# Altium PCB HS1-HS2.PcbDoc
Units mil, origin at the board's own origin, x right, y up, seen from the top; angles counter-clockwise.
Board outline 3000 x 3550 mil, 4 copper layers (Top Layer, Internal Plane 1, Internal Plane 2, Bottom Layer), stack 30.634 mil thick; 67 components, 55 nets, 272 pads, 41 vias.
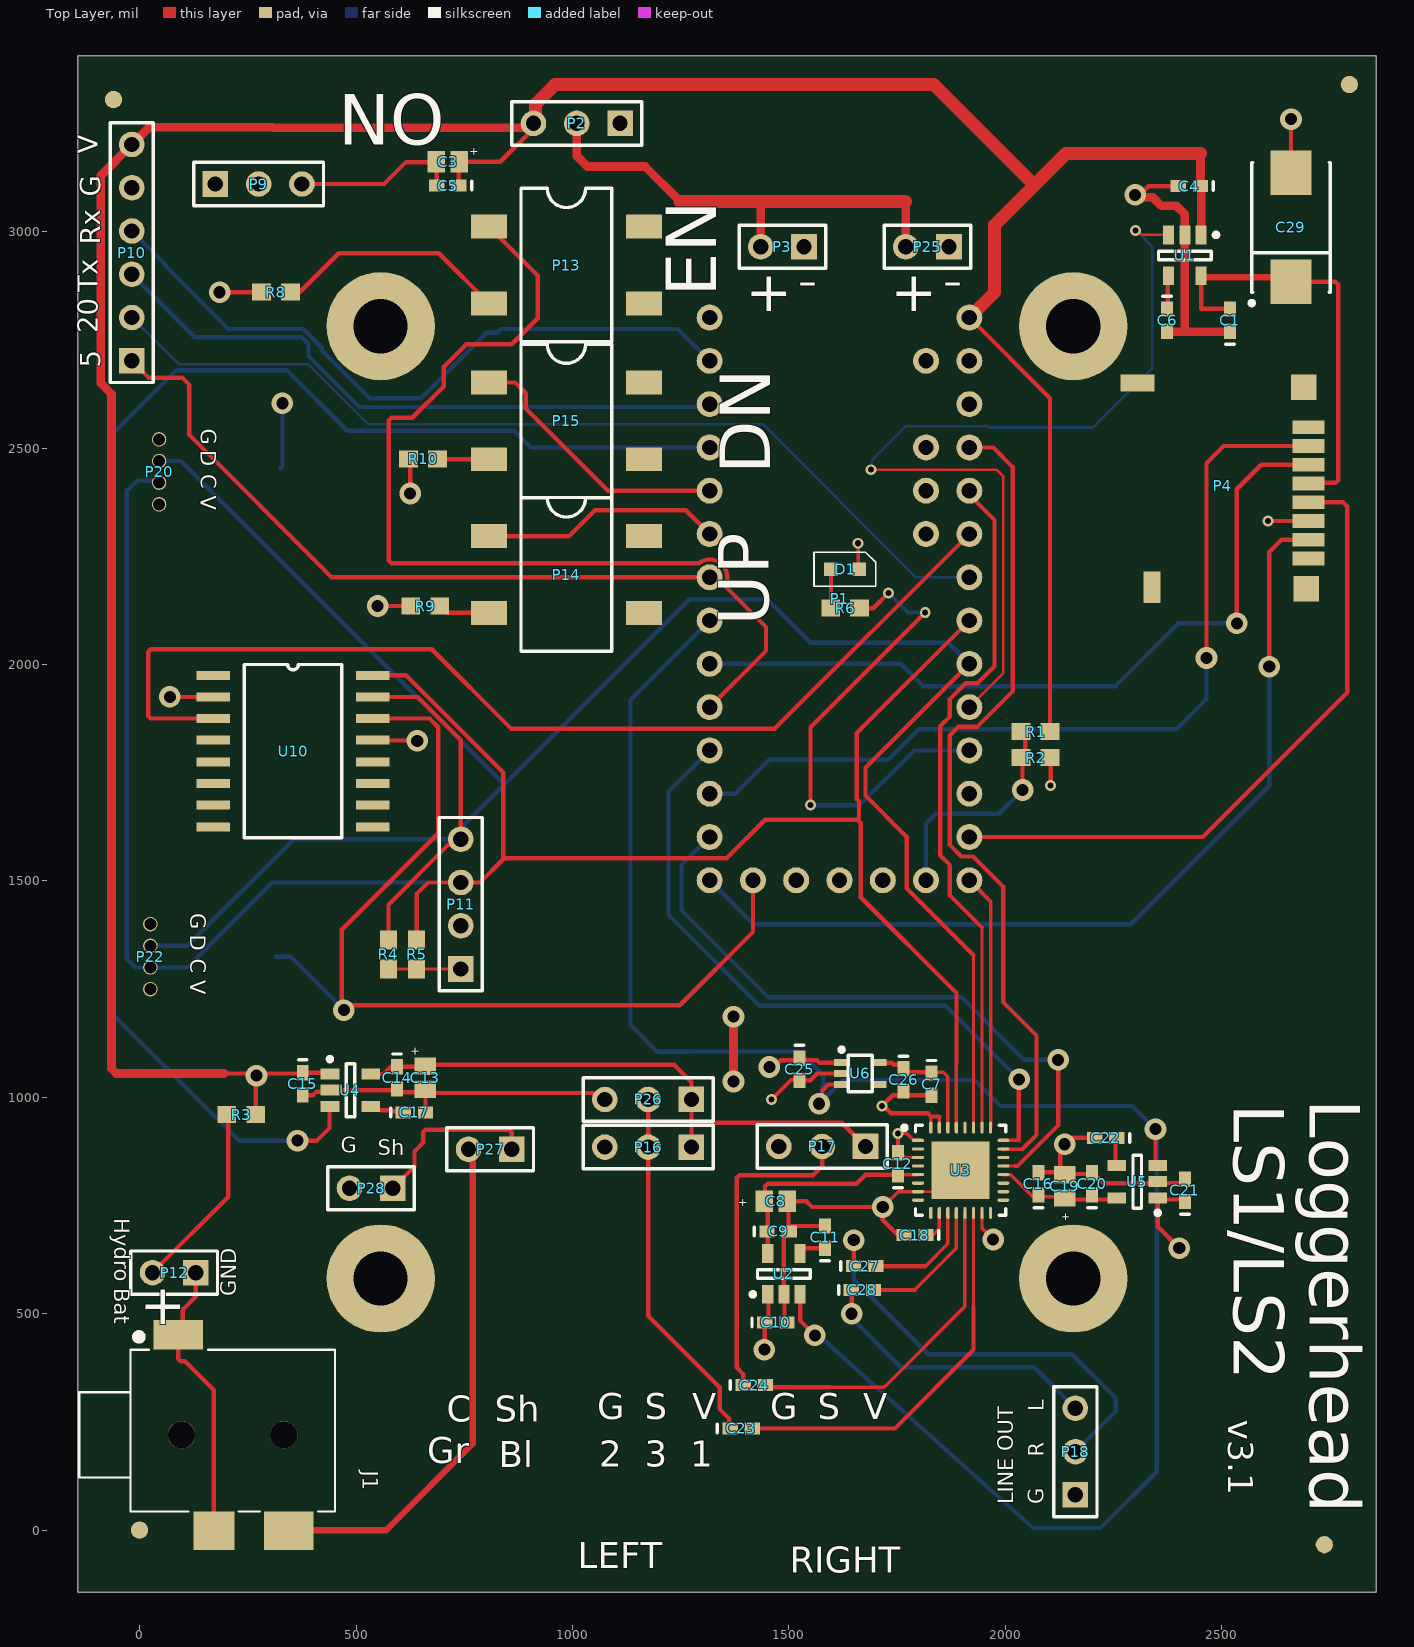
[diagram p0: Top Layer view]
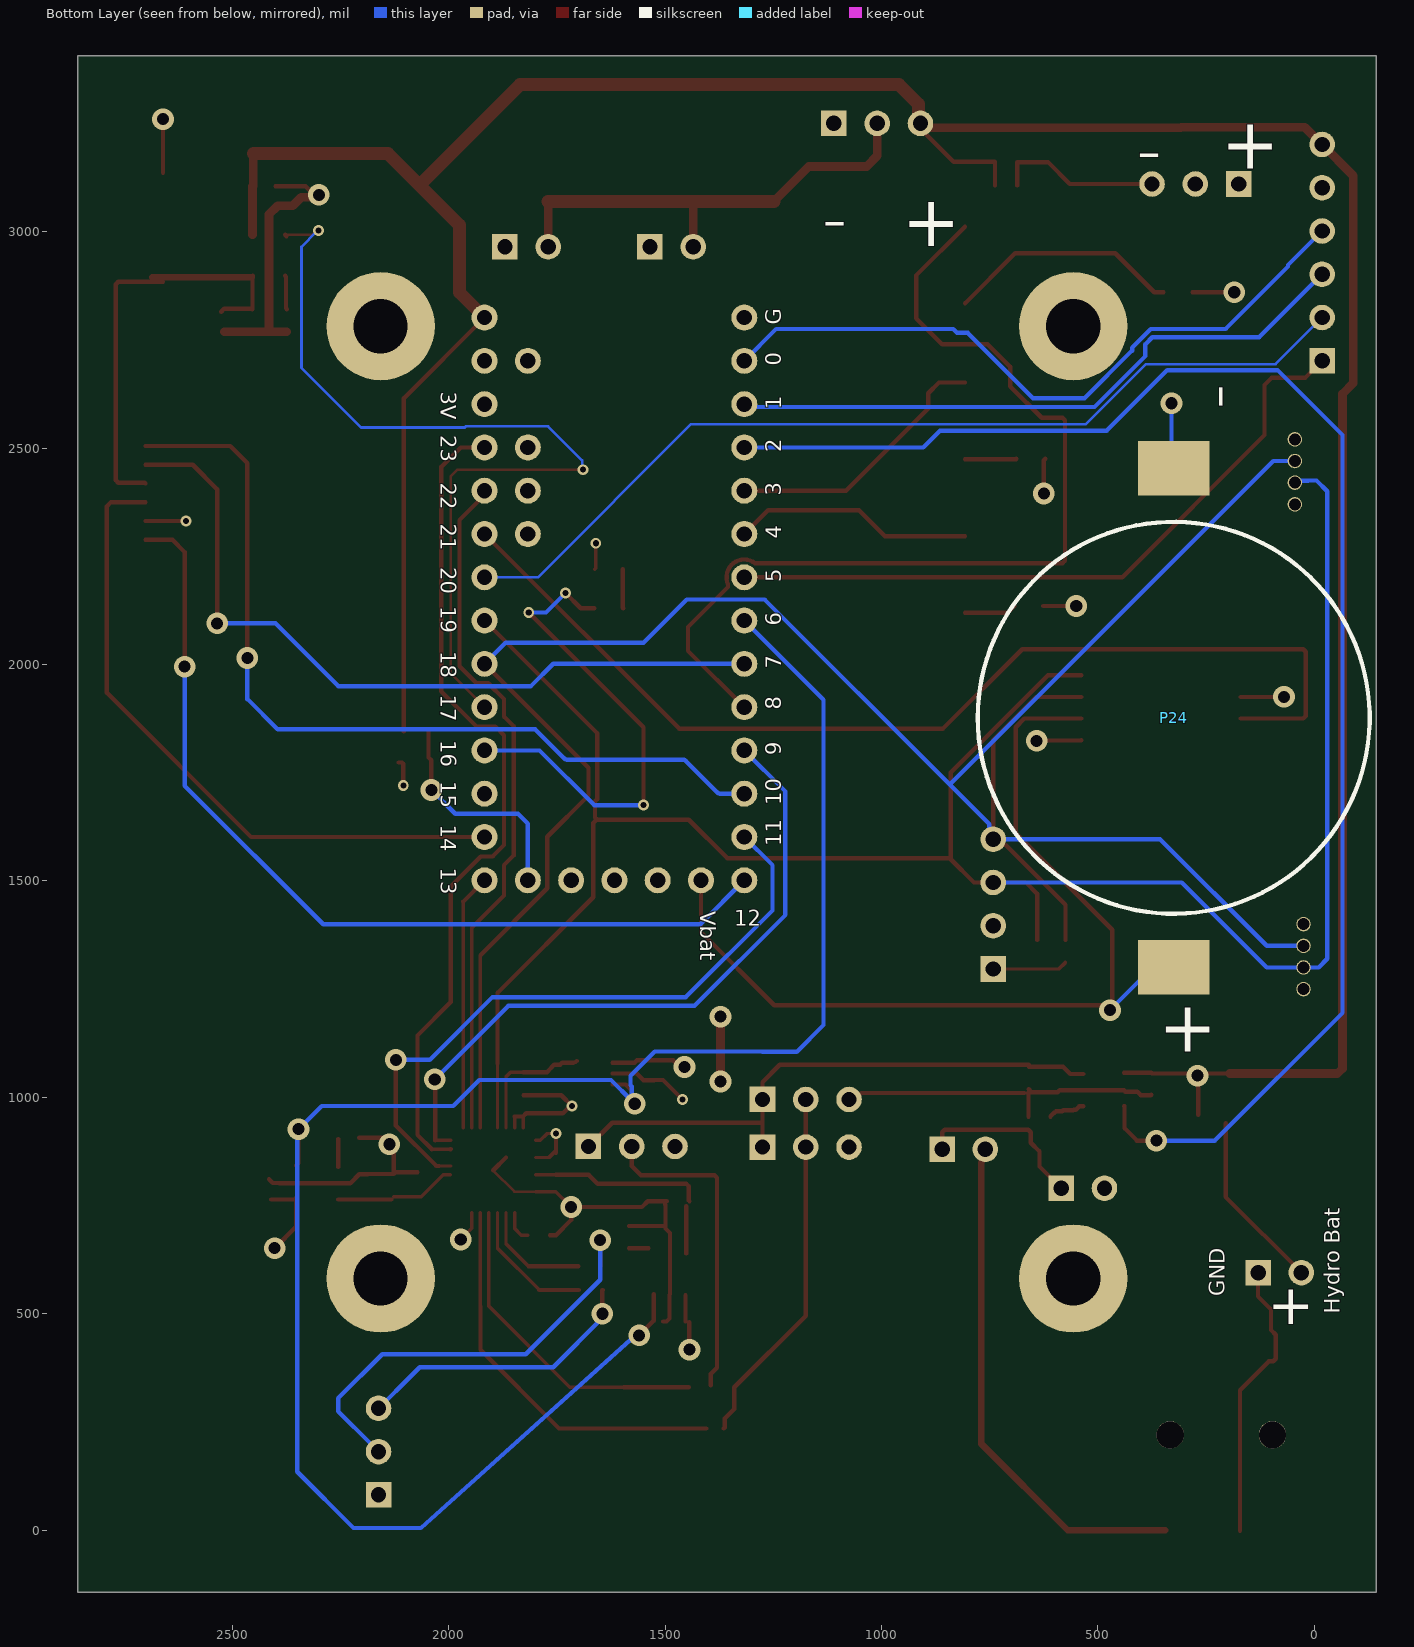
[diagram p1: Bottom Layer view, seen from below]
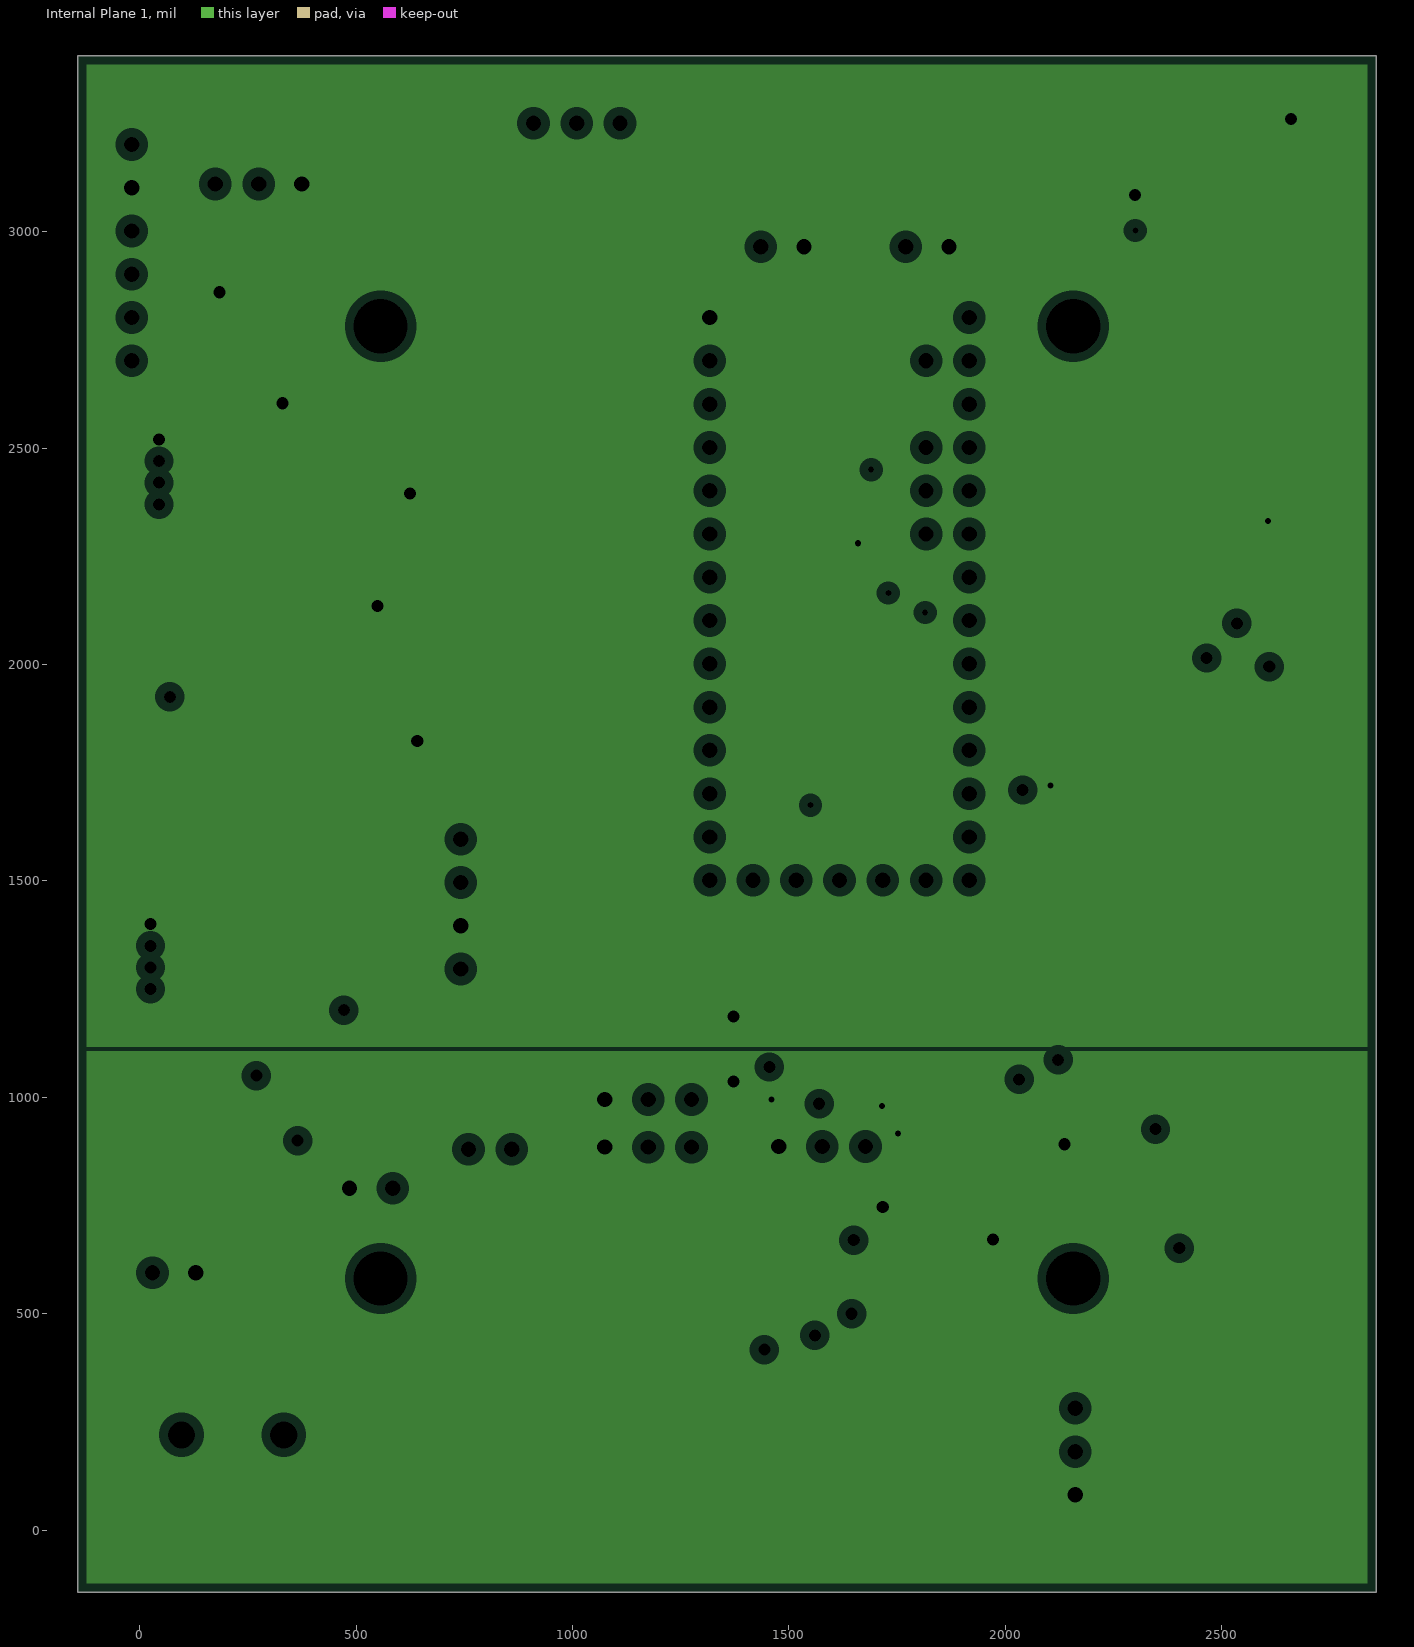
[diagram p2: Internal Plane 1, clearances drawn from the general rule]
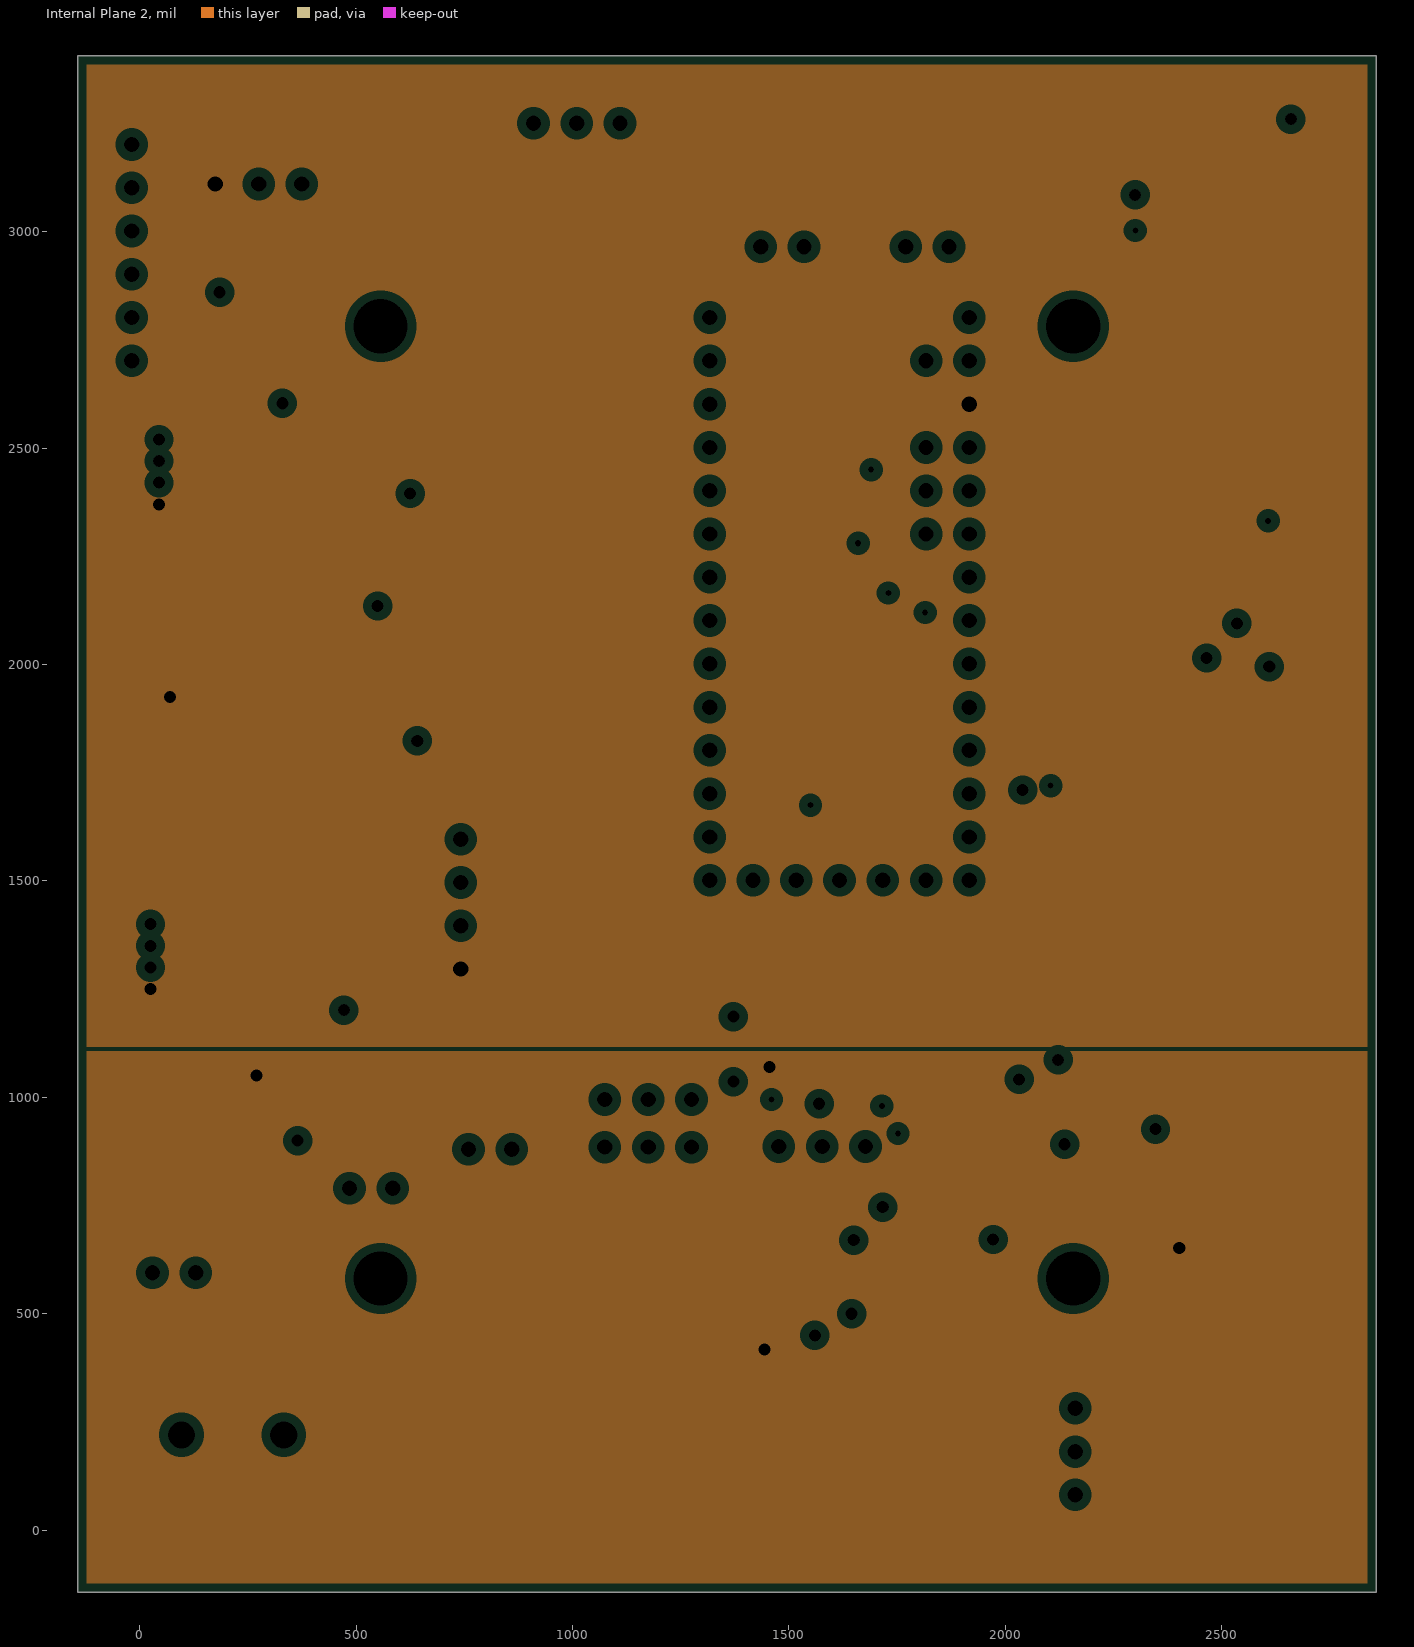
[diagram p3: Internal Plane 2, clearances drawn from the general rule]

## Layer stack, top to bottom
Top Solder: solder mask 0.4, Solder Resist, Dk 3.5
Top Layer: signal copper 1.4
Dielectric 1: core 10, FR-4, Dk 4.2
Internal Plane 1: plane copper 1.417, net (Multiple Nets)
Dielectric 3: prepreg 5, Dk 4.2
Internal Plane 2: plane copper 1.417, net (Multiple Nets)
Dielectric 2: core 10, Dk 4.2
Bottom Layer: signal copper 1.4
Bottom Solder: solder mask 0.4, Solder Resist, Dk 3.5

## Board outline
-142.95,-143.58 -142.95,3406.42 2857.05,3406.42 2857.05,-143.58

## Design rules (kind name [scope] priority, off if disabled: settings)
Clearance [All] p1: gap=6 ignorepadtopadclearanceinfootprint=FALSE except(0: Arc-Hole Track-Hole SMDPad-Hole THPad-Hole Via-Hole Fill-Hole Poly-Hole Region-Hole Text-Hole)
PlaneClearance [All] p1: clearance=20
PlaneConnect [All] p1: planeconnectstyle=Relief reliefexpansion=20 reliefentries=4 reliefconductorwidth=10 reliefairgap=10
PolygonConnect [All] p1: connectstyle=Relief reliefconductorwidth=10 reliefentries=4 polygonreliefangle="90 Angle" airgapwidth=10
RoutingVias [All] p1: holewidth=28 width=50 viastyle="Through Hole" minholewidth=28 minwidth=50 maxholewidth=28 maxwidth=50
SolderMaskExpansion [All] p1: expansion=4 istentingtop=FALSE
Width [All] p1: maxlimit=100 minlimit=6 preferedwidth=10
28 further rules are at their usual default settings.

## Classes and differential pairs
component class HS1-HS2: C1 C3 C4 C5 C6 C29 D1 P1 P2 P3 P4 P9 P10 P11 P13 P14 P15 P20 P22 P24 P25 R1 R2 R4 R5 R6 R8 R9 R10 U1 U10
component class HS1-HS2_audio: C7 C8 C9 C10 C11 C12 C13 C14 C15 C16 C17 C18 C19 C20 C21 C22 C23 C24 C25 C26 C27 C28 J1 P12 P16 P17 P18 P26 P27 P28 R3 U2 U3 U4 U5 U6

## Components (designator, comment, footprint, x,y, rotation, side; value= is the part's Value field where it differs from the comment)
C1 "2.2uF" 0402 2518.86,2795.16 r90 top value=0.1uF
C3 "10uF" Tant0805 712.05,3161.42 r0 top
C4 "2.2uF" 0402 2425.59,3105 r180 top value=0.1uF
C5 "0.1uF" 0402 712.05,3106.42 r180 top
C6 "0.01uF" 0402 2373.86,2795.16 r270 top value=0.1uF
C7 "0.1uF" 0402 1830,1030 r270 top
C8 "10uF" Tant0805 1470,760 r180 top
C9 "0.1uF" 0402 1475,690 r0 top
C10 "1uF" 0402 1470,480 r0 top value=0.1uF
C11 "0.01uF" 0402 1583.58,677.05 r90 top value=0.1uF
C12 "0.1uF" 0402 1752.05,846.42 r90 top
C13 "10uF" Tant0805 660,1045 r90 top
C14 "0.1uF" 0402 595,1045 r270 top
C15 "1uF" 0402 377.05,1031.42 r270 top value=0.1uF
C16 "0.1uF" 0402 2076.54,800.31 r90 top
C17 "0.01uF" 0402 635,965 r0 top value=0.1uF
C18 "0.1uF" 0402 1791.46,681.42 r180 top
C19 "10uF" Tant0805 2137.06,794.63 r270 top
C20 "0.1uF" 0402 2200.65,800.31 r90 top
C21 "1uF" 0402 2415,785 r90 top value=0.1uF
C22 "0.01uF" 0402 2232.05,906.42 r180 top value=0.1uF
C23 "1.0uF" 0402 1390,235 r0 top value=0.1uF
C24 "1.0uF" 0402 1420,335 r0 top value=0.1uF
C25 "1.0uF" 0402 1525,1065 r270 top value=0.1uF
C26 "1.0uF" 0402 1765,1040 r270 top value=0.1uF
C27 "1.0uF" 0402 1675,610 r0 top value=0.1uF
C28 "1.0uF" 0402 1670,555 r0 top value=0.1uF
C29 "T495X227K010ATE050" X 2660,3010 r90 top value=220uF
D1 "LED_0603" Diode0603 1630,2220 r0 top
J1 "MJ1-3510-SMT" CUI_MJ1-3510-SMT 215,220 r0 top
P1 "Teensy3.x" Teensy3.x 1817.05,2701.42 r180 top
P2 "switch" HDR1X3 1110,3250 r180 top
P3 "Header 2" HDR1X2 1535,2965 r180 top
P4 "microSD Hirose" "DM3D microSD" 2575,2485 r180 top
P9 "BIG CAP 1000 uF" HDR1X3 175,3110 r0 top
P10 "Header 6" HDR1X6 -17.95,2701.42 r90 top
P11 "Header 4" HDR1X4 742.05,1296.42 r90 top
P12 "Header 2" HDR1X2 130,595 r180 top
P13 "pushbutton" SOP4 807.05,3011.42 r0 top
P14 "pushbutton" SOP4 807.05,2296.42 r0 top
P15 "pushbutton" SOP4 807.05,2651.42 r0 top
P16 "HYDROPHONE" HDR1X3 1275,885 r180 top
P17 "HYDROPHONE" HDR1X3 1677.05,886.42 r180 top
P18 "Header 3" HDR1X3 2162,81.42 r90 top
P20 "1x4 1.27mm" "Header1x4 1.27mm" 45,2370 r90 top
P22 "1x4 1.27mm" "Header1x4 1.27mm" 25,1250 r90 top
P24 "CoinCellHolder" CoinCellHolder 325,1300 r90 bottom
P25 "Header 2" HDR1X2 1870,2965 r180 top
P26 "HYDROPHONE_MON" HDR1X3 1275,995 r180 top
P27 "Header 2" HDR1X2 860,880 r180 top
P28 "Header 2" HDR1X2 585,790 r180 top
R1 "100k" 3-0603 2070,1845 r0 top
R2 "100k" 3-0603 2070,1785 r180 top
R3 "empty" 3-0603 235,960 r0 top
R4 "4.7k" 3-0603 575,1330 r270 top
R5 "4.7k" 3-0603 640,1330 r270 top
R6 "330X" 3-0603 1630,2130 r180 top
R8 "10k" 3-0603 315,2860 r180 top
R9 "10k" 3-0603 660,2135 r180 top
R10 "10k" 3-0603 655,2475 r180 top
U1 "ADP1712AUJZ-3.3-R7" MF05A_N 2415,2945.16 r270 top
U2 "LP3985IM5-3.3" MF05A_N 1488.58,592.05 r90 top
U3 "SGTL5000" QFN32 1897.05,831.42 r0 top
U4 "LP3985IM5-3.3" MF05A_N 487.05,1016.42 r0 top
U5 "LP3985IM5-3.3" MF05A_N 2305,805 r180 top
U6 "TLV70018DCKR" TI-DCK5_V 1665,1055 r0 top
U10 "DS3231" DS3231 170,1975 r0 top

## Footprints (in the part's own frame and the unit in brackets; to place one, negate y for a bottom-side part, rotate by r counter-clockwise, add the part's x,y. Pads: shape width x height; smd on the part's side, far side on the other; paste and mask are expansions set on the pad)
3-0603 [mm] "Chip Resistor; Body 1.6 x 0.9 mm (LxW typ)"
  rect 1.1x1 smd: 1(-0.85,0) 2(0.85,0)
0402 [mm] "Chip Capacitor; Body 1.0 x 0.5 mm (LxW typ)"
  rect 0.9x0.7 smd: 1(-0.65,0) 2(0.65,0)
  silkscreen extent -1.4,-0.25 -1.4,0.25
CoinCellHolder [mm] "MPD BU2032SM-BT-GTR"
  rect 3.2x4.2 smd: 1(0,0) 2(29.3,0)
  silkscreen extent 3.15,-11.5 26.15,11.5
CUI_MJ1-3510-SMT [mm]
  rect 2.9x1.75 smd: 1(-3.2,5.875)
  rect 2.9x2.25 smd: 2(3.3,-5.625)
  rect 2.4x2.25 smd: 3(-1.1,-5.625)
  round 1.6 hole 1.6 unplated: ""(-3,0) ""(3,0)
  silkscreen extent -9,-4.5 6,5.95
Diode0603 [mm]
  rect 0.8x0.8 smd: A(-0.825,0) K(0.825,0)
  silkscreen extent -1.83,-1 1.8,1
"DM3D microSD" [mm] "MICROSD_HIROSE Push-Pull"
  rect 1.5x1.5 smd: 0(-3.048,7.874) 0(-2.921,-3.937)
  rect 1x1.85 smd: 0(6,7.8)
  rect 2x1 smd: 0(6.85,-4.191)
  rect 1.9x0.8 smd: 1(-3.188,-1.601) 2(-3.188,-0.501) 3(-3.188,0.599) 4(-3.188,1.699) 5(-3.188,2.799) 6(-3.188,3.899) 7(-3.188,4.999) 8(-3.188,6.099)
  body extent -3.65,-4.45 7.8,7.5, height 1.55
DS3231 [mm]
  rect 1.98x0.53 smd: 1(0,0) 2(0,-1.27) 3(0,-2.54) 4(0,-3.81) 5(0,-5.08) 6(0,-6.35) 7(0,-7.62) 8(0,-8.89) 9(9.37,-8.89) 10(9.37,-7.62) 11(9.37,-6.35) 12(9.37,-5.08) 13(9.37,-3.81) 14(9.37,-2.54) 15(9.37,-1.27) 16(9.37,0)
  silkscreen extent 1.83,-9.53 7.54,0.64
HDR1X2 [mm] "Connector; Header; 2 Position"
  rect 1.5x1.5 hole 0.9: 1(0,0)
  round 1.5 hole 0.9: 2(2.54,0)
  silkscreen extent -1.27,-1.27 3.81,1.27
HDR1X3 [mm] "Connector; Header; 3 Position"
  rect 1.5x1.5 hole 0.9: 1(0,0)
  round 1.5 hole 0.9: 2(2.54,0) 3(5.08,0)
  silkscreen extent -1.27,-1.27 6.35,1.27
HDR1X4 [mm] "Connector; Header; 4 Position"
  rect 1.5x1.5 hole 0.9: 1(0,0)
  round 1.5 hole 0.9: 2(2.54,0) 3(5.08,0) 4(7.62,0)
  silkscreen extent -1.27,-1.27 8.89,1.27
HDR1X6 [mm] "Connector; Header; 6 Position"
  rect 1.5x1.5 hole 0.9: 1(0,0)
  round 1.5 hole 0.9: 2(2.54,0) 3(5.08,0) 4(7.62,0) 5(10.16,0) 6(12.7,0)
  silkscreen extent -1.27,-1.27 13.97,1.27
"Header1x4 1.27mm" [mm]
  round 0.85 hole 0.7: 1(0,0) 2(1.27,0) 3(2.54,0) 4(3.81,0)
MF05A_N [mm] "SOT23, 5-Leads, Body 2.9x1.6mm, Pitch 0.95mm, Lead Span 2.8mm, IPC Medium Density"
  rect 1.1x0.65 smd: 1(-1.2,0.95) 2(-1.2,0) 3(-1.2,-0.95) 4(1.2,-0.95) 5(1.2,0.95)
  silkscreen extent -1.32,-1.55 0.25,1.95, body extent -0.9,-1.55 0.9,1.55, height 1.19
QFN32 [mm]
  oval 0.7x0.2 smd: 1(-2.5,1.75) 2(-2.5,1.25) 3(-2.5,0.75) 4(-2.5,0.25) 5(-2.5,-0.25) 6(-2.5,-0.75) 7(-2.5,-1.25) 8(-2.5,-1.75) 17(2.5,-1.75) 18(2.5,-1.25) 19(2.5,-0.75) 20(2.5,-0.25) 21(2.5,0.25) 22(2.5,0.75) 23(2.5,1.25) 24(2.5,1.75)
  oval 0.2x0.7 smd: 9(-1.75,-2.5) 10(-1.25,-2.5) 11(-0.75,-2.5) 12(-0.25,-2.5) 13(0.25,-2.5) 14(0.75,-2.5) 15(1.25,-2.5) 16(1.75,-2.5) 25(1.75,2.5) 26(1.25,2.5) 27(0.75,2.5) 28(0.25,2.5) 29(-0.25,2.5) 30(-0.75,2.5) 31(-1.25,2.5) 32(-1.75,2.5)
  rect 3.4x3.4 smd paste-1.2: 33(0,0)
  silkscreen extent -3.42,-2.65 2.65,2.65, body extent -2.5,-2.5 2.5,2.5, height 1
SOP4 [mm]
  rect 2.1x1.4 smd: 1(0,0) 2(0,-4.5) 3(9.1,-4.5) 4(9.1,0)
  silkscreen extent 1.89,-6.75 7.21,2.25
Tant0805 [mil]
  rect 40x50 smd: 1(-26.5,0) 2(26.5,0)
Teensy3.x [mil]
  round 60 hole 35.43: 0(500,0) 1(500,100) 2(500,200) 3(500,300) 3.3V(-100,100) 3.3V2(300,1200) 4(500,400) 5(500,500) 6(500,600) 7(500,700) 8(500,800) 9(500,900) 10(500,1000) 11(500,1100) 12(500,1200) 13(-100,1200) 14(-100,1100) 15(-100,1000) 16(-100,900) 17(-100,800) 18(-100,700) 19(-100,600) 20(-100,500) 21(-100,400) 22(-100,300) 23(-100,200) A10(0,300) A11(0,400) A14(0,1200) AGND(-100,0) AREF(0,200) GND(500,-100) GND2(200,1200) PGM(100,1200) VBat(400,1200) Vin(-100,-100) VUSB(0,0)
TI-DCK5_V [mm] "SOT23, 5-Leads, Body 2x1.25mm, Pitch 0.65mm"
  rect 0.9x0.4 smd: 1(-1.1,0.65) 2(-1.1,0) 3(-1.1,-0.65) 4(1.1,-0.65) 5(1.1,0.65)
  silkscreen extent -1.22,-1.07 0.7,1.52, body extent -0.63,-1 0.63,1, height 1.1
X [mm] "Capacitor, SM Tantalum; Body 7.3 x 4.3 mm (LxW typ)"
  rect 2.6x2.4 smd: 1(-3.2,0) 2(3.2,0)
  silkscreen extent -4.57,-2.3 3.8,2.42

## Part data
C1 C4 C5 C6 C7 C9 C10 C11 C12 C14 C15 C16 C17 C18 C20 C21 C22 C23 C24 C25 C26 C27 C28: library part C0402, "Ceramic Chip Capacitor - Standard", PackageDocument=Mar-2001, Code_IPC="1005 [0402]", Code_JEITA=0402, ComponentLink1Description="Manufacturer Link", ComponentLink1URL=http://www.kemet.com/, ComponentLink2Description=Datasheet, ComponentLink2URL=http://www.kemet.com/kemet/web/homepage/kechome.nsf/vapubfilesname/F3102TA.pdf/$file/F3102TA.pdf, DatasheetDocument=Mar-2001, LatestRevisionDate=19-Mar-2004, LatestRevisionNote="Silkscreen size reduced.", Note="Footprint corresponds to dimensions for bulk cassette packaging. This case size has tightened tolerances.", PackageReference=0402, Published=17-Jul-2002, Publisher="Altium Limited"
C3 C8 C13 C19: library part Tant0805
C29: library part T495X, "Solid Tantalum Chip Capacitor, Standard T495 Series - Low ESR, Surge Robust", PackageDocument=Mar-2001, Code_JEITA=7343-43, ComponentLink1Description="Manufacturer Link", ComponentLink1URL=http://www.kemet.com/, ComponentLink2Description=Datasheet, ComponentLink2URL=http://www.kemet.com/kemet/web/homepage/kechome.nsf/vapubfilesname/F3102TA.pdf/$file/F3102TA.pdf, DatasheetDocument=Mar-2001, LatestRevisionDate=19-Mar-2004, LatestRevisionNote="Silkscreen dimensions re-sized.", PackageReference=X, PCB_Layout="Round Glue Pad at 2.9 ±0.1mm in diameter at KEMET's option", Published=17-Jul-2002, Publisher="Altium Limited"
J1: "3.5 mm, Mono, Right Angle, Surface Mount (SMT), Audio Jack Connector", Package=None, Availability=Unavailable, MF="{'manufacturer': u'CUI'}", MP=MJ1-3510-SMT, Price=None
P2 P9 P16 P17 P26: library part "Header 3", "Header, 3-Pin", LatestRevisionDate=17-Jul-2002, LatestRevisionNote="Re-released for DXP Platform.", Publisher="Altium Limited"
P3 P12 P25 P27 P28: "Header, 2-Pin", LatestRevisionDate=17-Jul-2002, LatestRevisionNote="Re-released for DXP Platform.", Publisher="Altium Limited"
P4: Supplier Part Number 1=HR1941DKR-ND, Supplier 1=Digi-Key
P10: "Header, 6-Pin", LatestRevisionDate=17-Jul-2002, LatestRevisionNote="Re-released for DXP Platform.", Publisher="Altium Limited"
P11: "Header, 4-Pin", LatestRevisionDate=17-Jul-2002, LatestRevisionNote="Re-released for DXP Platform.", Publisher="Altium Limited"
P13 P14 P15: Supplier Part Number 1=450-1757-2-ND, Supplier 1=Digi-Key
P18: "Header, 3-Pin", LatestRevisionDate=17-Jul-2002, LatestRevisionNote="Re-released for DXP Platform.", Publisher="Altium Limited"
P20 P22: library part "Header 1x4 1.27mm"
P24: Supplier Part Number 1=BU2032SM-BT-GCT-ND, Supplier 1=Digi-Key
R1 R2 R3 R4 R5 R6 R8 R9 R10: library part ERJ3RK, "Precision Thick Film Chip Resistor, 10 Ohm to 1M Ohm Range, 1% and 0.5% Tolerance, 0603 Size, 0.063 W", PackageDocument=Mar-2003, Code_IPC="1608 [0603]", ComponentLink1Description="Manufacturer Link", ComponentLink1URL=http://www.panasonic.com/industrial/components/resistive_products.htm, ComponentLink2Description=Datasheet, ComponentLink2URL=http://www.panasonic.com/industrial/components/pdf/AOA0000CE2.pdf, LatestRevisionDate=19-Mar-2004, LatestRevisionNote="Silkscreen size reduced.", PackageReference=3-0603, Published=17-Dec-2003, Publisher="Altium Limited"
U1: library part LP3985IM5-3.3, "Micropower, 150mA Low-Noise Ultra Low-Dropout CMOS Voltage Regulator", DigiKeyPartNumber=LP3985IM5-3.3CT-ND, Manufacturer="National Semiconductor", PackageTopMarking=LDQB*XTT, PowerWise=N, ComponentLink1Description="LP3985 Datasheet", ComponentLink1URL=http://www.national.com/ds/LP/LP3985.pdf, ComponentLink2Description="LP3985 Web Page", ComponentLink2URL=http://www.national.com/pf/LP/LP3985.html, ComponentLink3Description="MF05A Package Page", ComponentLink3URL=http://www.national.com/packaging/folders/mf05a.html, CompType="LDO IC", DatasheetVersion=Aug-2005, PackageDescription="Molded SOT-23, .115 x .063 x .040 in Body, 5 Lead, .0375 in Pitch", PackageReference=MF05A, PackageVersion="revD, Aug-2008", PartNumber=LP3985IM5-3.3, PinCount=5, Published=4-Dec-2008, Publisher="Altium Limited", RoHS=O
U2 U4 U5: "Micropower, 150mA Low-Noise Ultra Low-Dropout CMOS Voltage Regulator", DigiKeyPartNumber=LP3985IM5-3.3CT-ND, Manufacturer="National Semiconductor", PackageTopMarking=LDQB*XTT, PowerWise=N, ComponentLink1Description="LP3985 Datasheet", ComponentLink1URL=http://www.national.com/ds/LP/LP3985.pdf, ComponentLink2Description="LP3985 Web Page", ComponentLink2URL=http://www.national.com/pf/LP/LP3985.html, ComponentLink3Description="MF05A Package Page", ComponentLink3URL=http://www.national.com/packaging/folders/mf05a.html, CompType="LDO IC", DatasheetVersion=Aug-2005, PackageDescription="Molded SOT-23, .115 x .063 x .040 in Body, 5 Lead, .0375 in Pitch", PackageReference=MF05A, PackageVersion="revD, Aug-2008", PartNumber=LP3985IM5-3.3, PinCount=5, Published=4-Dec-2008, Publisher="Altium Limited", RoHS=O
U6: "Single Output LDO, 200 mA, Fixed 1.8 V Output, 2 to 5.5 V Input, with Low IQ, 5-pin SC70 (DCK), -40 to 125 degC, Green (RoHS & no Sb/Br)", Manufacturer="Texas Instruments", Supplier Part Number 1=296-32409-2-ND, Accuracy(%)=2, Code_JEDEC=MO-203, ComponentLink1Description="Manufacturer URL", ComponentLink1URL=http://www.ti.com/, ComponentLink2Description=Datasheet, ComponentLink2URL=http://www.ti.com/general/docs/lit/getliterature.tsp?genericPartNumber=TLV70018&fileType=pdf, ComponentLink3Description="Package Specification", ComponentLink3URL=http://www.ti.com/litv/pdf/mpds025f, DatasheetVersion=SLVSA00D, Eco-Plan="Green (RoHS & no Sb/Br)", Fixed Output Options(V)=1.8, Iout(Max)(A)=0.2, Iq(Typ)(mA)=0.03, Mounting Technology="Surface Mount", PackageDescription="5-Pin Plastic Small-Outline, Body 2 x 1.25 mm, Pitch 0.65 mm", PackageReference=DCK5, PackageVersion=4093553-3/G, PartNumber=TLV70018DCKR, SubFamily="Single Channel LDO", Supplier 1=Digi-Key, Supplier 2=Digi-Key, Supplier 3=Digi-Key, Supplier 4=Newark, Supplier 5=Mouser, Supplier Part Number 2=296-32409-1-ND, Supplier Part Number 3=296-32409-6-ND, Supplier Part Number 4=55R7461, Supplier Part Number 5=595-TLV70018DCKR, Vdo(Typ)(mV)=175, Vin(Max)(V)=5.5, Vin(Min)(V)=2, Vout Adj(Max)(V)=1.8, Vout Adj(Min)(V)=1.8
U10: Supplier Part Number 1=DS3231S#-ND, Supplier 1=Digi-Key

## Free pads (board coordinates)
  round 40 smd paste-20 mask+5: 0(-60,3305) 0(0,0) 0(2737.05,-33.58) 0(2795,3340)
  round 250 hole 125: 0(557.05,581.42) 0(557.05,2781.42) 0(2157.05,581.42) 0(2157.05,2781.42)

## Via types
v1: diameter 50, hole 28, Top Layer to Bottom Layer, tented both sides, 30 vias
v2: diameter 25, hole 14, Top Layer to Bottom Layer, tented both sides, 9 vias
v3: diameter 25, hole 14, Top Layer to Bottom Layer, 2 vias

## Nets (pads, with @x,y where several pads share a name; then routed paths per layer and width w, separated by ;. In a path a pad name is that pad's centre, name@x,y a point inside that pad or via, vN(x,y) a via of type N, cw(c..) or ccw(c..) an arc to the next point about the centre after c; other vN are vias at no path point)
AGND: C7.2 C8.1 C9.2 C10.2 C11.2 C12.2 C13.1 C14.2 C15.2 C16.2 C17.2 C18.2 C19.1 C20.2 C21.2 C22.2 C25.2 C26.2 J1.1 J1.3 P12.1 P16.3 P17.3 P18.1 P26.3 P28.2 U2.2 U3.1 U3.3 U3.7 U3.15 U3.31 U3.32 U3.33 U4.2 U5.2 U6.2 | length 3586.8
  Top Layer w6: U3.7 1847.83,782.2 U3.33
  Top Layer w8: v1@1723.27,752.64 1752.83,782.2 U3.7 ; C12.2@1752.05,877.01 1768.11,860.94 U3.3 ; v3(1752.05,916.42) 1772.05,916.42 1788.15,900.31 U3.1 ; U3.32 1828.15,955.31 ; U3.31 1847.83,955.63 ; U3.15 1946.26,697.2 v1(1972.05,671.42)
  Top Layer w10: P12.1@152.32,572.68 P12.1 130,540 100,510 100,462.28 J1.1 89.02,395.86 94.87,390 105,390 171.69,323.31 J1.3 ; C15.2 377.87,1005 400.86,1005 409.01,1013.15 436.53,1013.15 U4.2 588.27,1016.42 592.64,1012.05 653.55,1012.05 C13.1 ; C17.2@660.59,955 C17.2 660.59,1008.46 C13.1@662.05,1009.92 ; C13.1@670,1009.92 1046.81,1009.92 P26.3@1075,981.73 ; v2(1460,995) 1505,1040 C25.2@1525,1040 ; C8.1 C8.1@1500.08,760 ; C8.1@1499.17,751.14 1499.17,697.05 1488.58,686.46 U2.2 1490,543.39 1490,488.78 1496.73,482.05 C10.2@1504.17,482.05 ; C8.1@1500.08,752.05 C8.1@1500.08,760 ; C9.2@1504.76,702.64 C11.2 ; C25.2 1550,1039.41 1565.59,1055 U6.2 ; v1@1723.27,752.64 v1(1717.05,746.42) ; C12.2 1752.05,877.01 v3(1752.05,916.42) ; C18.2 1752.05,681.42 1717.05,716.42 v1(1717.05,746.42) ; C7.2@1827.05,1004.92 1739.92,1004.92 v3(1715,980) 1719.06,980 1736.07,962.99 1820.79,962.99 1828.15,955.63 1847.83,955.63 ; U3.33@1867.52,860.94 U3.33 ; C16.2@2072.05,827.01 C19.1@2122.64,827.01 ; v1@2127.05,881.42 2127.05,822.92 2186.14,822.92 ; v1@2152.05,906.42 C22.2 ; C20.2@2187.05,822.01 2206.46,822.01 2227.05,801.42 2391.42,801.42 2392.08,802.08 2406.49,802.08 C21.2 ; C8.1@1500.08,760 1540,760 1553.58,746.42 v1(1717.05,746.42)
  other v1: 2137.05,891.42 1372.05,1036.42
BATT_BACK: P1.VBat P24.1 U10.14 | length 2241.5
  Top Layer w10: U10.14 670,1875 690,1855 690,1610 467.05,1387.05 467.05,1212.87 1247.87,1212.87 1417.05,1382.05 P1.VBat
  Bottom Layer w10: P24.1@315,1325 348.46,1325 v1(472.05,1201.42)
BCLK: P1.9 U3.24 | length 1563.8
  Top Layer w8: U3.24 2030.94,900.31
  Top Layer w10: 2030.94,900.31 2030.94,1040.31 v1(2032.05,1041.42)
  Bottom Layer w10: P1.9 1222.05,1706.42 1222.05,1421.42 1432.05,1211.42 1862.05,1211.42 v1(2032.05,1041.42)
CAL_PORT: J1.2 P27.2 | length 1192.4
  Top Layer w15: J1.2@344.92,0 555,0 570,0 770,200 770,849.19 768.43,850.76 768.43,881.62 P27.2@770,883.19
CS: P1.10 P4.2 | length 2034.2
  Top Layer w10: v1@2465,2020 2465,2465 2504.72,2504.72 P4.2
  Bottom Layer w10: P1.10 1372.28,1701.42 ccw(c1372.28,1711.42) 1379.33,1704.33 1452.09,1777.09 cw(c1459.14,1770) 1459.14,1780 1725.86,1780 ccw(c1725.86,1790) 1732.93,1782.93 1800,1850 2395,1850 2465,1920 v1@2465,2020
  other v1: 2465,2015
DGND: C1.1 C3.1 C4.2 C5.2 C6.2 C29.2 D1.K P1.GND P3.1 P4.6 P9.3 P10.5 P11.2 P20.4 P22.4 P24.2 P25.1 R2.1 R8.2 R9.2 R10.2 U1.2 U10.13 | length 1895.1
  Top Layer w8: v2(1660,2280) 1660,2222.48 D1.K
  Top Layer w10: v1(185,2860) R8.2 ; P9.3 565,3110 615.51,3160.51 686.46,3160.51 C5.2 ; U10.13 539.69,1824.21 640.79,1824.21 v1(641.58,1823.42) ; v1(550,2135) R9.2 ; R10.2 625,2471.54 v1(625,2395) ; v2(2104.8,1720.2) 2104.8,1770.31 2107.95,1773.46 R2.1@2115,1773.46 ; v1(2300,3085) 2310.82,3085 2330.82,3105 C4.2 ; C6.2 C6.2@2374.77,2768.66 ; v2(2607.16,2331.6) 2700.41,2331.6 P4.6 ; C29.2 v1(2660,3260)
  Top Layer w20: v1(2300,3085) 2305.74,3079.26 2340.74,3079.26 2360,3060 2395,3060 2415,3040 U1.2 2415,2768.66 ; C6.2@2374.77,2768.66 2415,2768.66 ; C1.1@2518.86,2768.66 2415,2768.66
  Bottom Layer w10: P24.2 330,2458.54 v1(330,2603.54)
  other v1: 1372.05,1186.42
DN-TX: P1.3 P15.1 | length 634.1
  Top Layer w10: P15.1 867.05,2651.42 892.05,2626.42 892.05,2591.42 1082.05,2401.42 P1.3
ENT-RST: P1.8 P13.1 | length 2252.8
  Top Layer w10: P13.1 920,2898.46 920,2800 860,2740 755,2740 702.5,2687.5 702.5,2642.5 630,2570 581.86,2570 576,2564.14 576,2239.9 581.86,2234.05 1292.22,2234.05 cw(c1317.05,2201.42) 1354.61,2184.97 1354.61,2183 1354.61,2178.86 1447.05,2086.42 1447.05,2031.42 P1.8
HYDRO_EN: P1.2 U4.3 | length 3543.7
  Top Layer w10: v1(365,900) 410,900 438.82,928.82 438.82,980 U4.3
  Bottom Layer w10: v1(365,900) 230,900 -65,1195 -65,2530 85,2680 340,2680 480,2540 865,2540 903.58,2501.42 P1.2
I2SDIN: P1.22 U3.26 | length 1603.2
  Top Layer w8: U3.26 1946.26,1392.2
  Top Layer w10: P1.22 1917.05,2391.42 1975,2333.46 1975,1995.73 1935.69,1956.42 1908.41,1956.42 1872.05,1920.06 1872.05,1879.54 1850,1857.5 1850,1558.46 1872.05,1536.42 1872.05,1466.42 1946.26,1392.2
I2SDOUT: P1.13 U3.25 | length 591.8
  Top Layer w8: U3.25 1965.94,1452.52
  Top Layer w10: P1.13 1965.94,1452.52
IN_L: C23.2 U3.14 | length 913.5
  Top Layer w8: 1926.57,516.78 U3.14
  Top Layer w10: C23.2@1404.75,235 1745,235 1926.57,416.57 1926.57,516.78
IN_R: C24.2 U3.13 | length 754.8
  Top Layer w8: 1595.63,330 1720,330 1906.89,516.89 U3.13
  Top Layer w10: C24.2@1445.59,330 1595.63,330
INT: P1.21 U10.3 | length 2462.3
  Top Layer w10: U10.3 25.86,1875 20,1880.86 20,2029.14 25.86,2035 675,2035 858.18,1851.82 1467.45,1851.82 P1.21
LED1: P1.16 R6.1 | length 1158.9
  Top Layer w10: v2(1550,1675) 1550,1855 v2(1815,2120) ; R6.1 1695,2130 v2(1730,2165)
  Bottom Layer w10: v2(1550,1675) 1663.55,1675 1789.97,1801.42 P1.16 ; v2(1730,2165) 1775,2120 v2(1815,2120)
LRCLK: P1.23 U3.23 | length 1936.7
  Top Layer w8: U3.23@1995.79,880.31 2039.23,880.31
  Top Layer w10: P1.23 1972.05,2501.42 2017.05,2456.42 2017.05,1937.78 1935.69,1856.42 1892.05,1856.42 1872.05,1836.42 1872.05,1582.78 1898.41,1556.42 1925.69,1556.42 1995,1487.1 1995,1220 2072.05,1142.95 2072.05,913.13 2039.23,880.31 ; U3.23 U3.23@1995.79,880.31
MCLK: P1.11 U3.21 | length 1526.7
  Top Layer w8: U3.21 2021.89,841.26
  Top Layer w10: 2021.89,841.26 2028.46,841.26 2122.05,934.85 v1(2122.05,1086.42)
  Bottom Layer w10: P1.11 1252.05,1536.42 1252.05,1431.42 1452.05,1231.42 1898.62,1231.42 2043.62,1086.42 v1(2122.05,1086.42)
MISO: P1.12 P4.7 | length 2109.7
  Top Layer w10: v1(2610,1995) 2610,2260 2638.19,2288.19 P4.7
  Bottom Layer w10: P1.12 1418.46,1400 2290,1400 2610,1720 v1(2610,1995)
MOSI: P1.7 P4.3 | length 1798.2
  Top Layer w10: v1(2535,2095) 2535,2405 2591.42,2461.42 P4.3
  Bottom Layer w10: P1.7 1758.58,2001.42 1810,1950 2255,1950 2400,2095 v1(2535,2095)
NetC6_1: C6.1 U1.4 | length 78.7
  Top Layer w10: C6.1 2375.73,2822.62 2375.73,2896.04 U1.4
NetC11_1: C11.1 U2.4 | length 45.4
  Top Layer w10: U2.4@1538.15,651.46 C11.1
NetC17_1: C17.1 U4.4 | length 85.8
  Top Layer w10: U4.4 543.15,979.02 550.94,971.22 555.58,971.22 556.8,970 580,970 582.55,967.45 596.96,967.45 600.21,964.2 601.43,964.2 609.41,956.22 C17.1@609.41,955
NetC18_1: C18.1 U3.10 | length 73.1
  Top Layer w8: C18.1 1832.05,681.42 1847.83,697.2 U3.10
NetC22_1: C22.1 U5.4 | length 64.8
  Top Layer w10: U5.4@2254.8,838.82 C22.1@2254.8,903.58
NetC23_1: C23.1 P16.2 P26.2 | length 838.5
  Top Layer w10: P26.2 P16.2 1175,495 1340,330 1340,280 1362.08,257.92 1362.08,237.33 C23.1
NetC24_1: C24.1 P17.2 | length 738.5
  Top Layer w10: C24.1 1394.41,360.59 1380,375 1380,814.14 1385.86,820 1555.63,820 1577.05,841.42 P17.2
NetC27_2: C27.2 U3.11 | length 259.5
  Top Layer w8: 1815.63,610 1867.52,661.89 U3.11
  Top Layer w10: C27.2 1815.63,610
NetC28_2: C28.2 U3.12 | length 309.4
  Top Layer w8: 1790.63,555 1887.2,651.57 U3.12
  Top Layer w10: C28.2@1699.23,555 1790.63,555
NetD1_A: D1.A R6.2 | length 90.4
  Top Layer w10: R6.2 1597.52,2130.98 D1.A
NetP13_2: P13.2 R8.1 | length 543.8
  Top Layer w10: R8.1 370,2860 460,2950 691.3,2950 P13.2
NetP14_2: P14.2 R9.1 | length 120.1
  Top Layer w10: R9.1 709.21,2119.25 P14.2
NetP15_2: P15.2 R10.1 | length 118.9
  Top Layer w10: R10.1 689.21,2474.25 P15.2
OUT_L: C27.1 P18.2 | length 1011.1
  Top Layer w10: v1@1646.27,670 v1(1650,670) 1650,610.59 C27.1
  Bottom Layer w10: v1(1650,670) 1650,578.46 1822.05,406.42 2153.58,406.42 2255,305 2255,274.42 P18.2@2179.52,198.94
OUT_R: C28.1 P18.3 | length 693.4
  Top Layer w10: C28.1 1645,554.41 v1(1645,500)
  Bottom Layer w10: v1(1645,500) 1645,490 1758.58,376.42 2067,376.42 P18.3@2179.52,263.89
Pin5: P1.5 P10.1 | length 1610
  Top Layer w10: P10.1 20.72,2662.75 98.09,2662.75 115,2645.84 115,2530 443.58,2201.42 P1.5
Pin20: P1.20 P10.2 | length 2183.5
  Bottom Layer w6: P10.2 89.46,2694 389.04,2694 528.04,2555 1440,2555 1793.58,2201.42 P1.20
POW1: P1.17 U1.3 | length 2053
  Top Layer w6: v2(1690,2450) 1980,2450 1995,2435 1995,1979.37 P1.17 ; v2(2300.7,3002.69) 2305.85,3002.69 2316.14,2992.4 U1.3
  Top Layer w10: U1.3@2374.71,2989.51 U1.3
  Bottom Layer w6: v2(1690,2450) 1691.5,2451.5 1691.5,2471.5 1770,2550 1960,2550 1962.51,2547.49 2202.49,2547.49 2340,2685 2340,2965 v2@2305,3000
RX: P1.0 P10.4 | length 1598.6
  Bottom Layer w10: P10.4 60.76,2922.7 60.76,2919.24 205,2775 377.9,2775 421.05,2731.85 421.05,2725.08 531.13,2615 650,2615 771.28,2736.28 800,2765 800,2766.33 825.7,2766.33 834.38,2775 1243.46,2775 P1.0
SCK: P1.14 P4.5 | length 1535.2
  Top Layer w6: P4.5@2700.31,2375 P4.5
  Top Layer w10: P1.14 2456.42,1601.42 2790,1935 2790,2365 2780,2375 P4.5@2700.31,2375
SCL: P1.19 P11.3 P20.2 P22.2 R5.1 U3.29 U10.16 | length 5196.3
  Top Layer w8: U3.29 1887.2,1077.98
  Top Layer w10: U10.16 615.25,1975 840,1750.25 840,1552.58 ; R5.1 640,1470 666.42,1496.42 P11.3 786.42,1496.42 840,1550 840,1552.58 ; 1887.2,1077.98 1887.2,1241.26 1666.09,1462.37 1666.09,1633.91 1657.82,1642.19 ; P1.19 1657.05,1841.42 1657.05,1688.83 1662.05,1683.83 1662.05,1646.42 1657.82,1642.19 ; 840,1552.58 1356.59,1552.58 1445.43,1641.42 1657.05,1641.42 1657.82,1642.19
  Bottom Layer w10: P20.2 40.51,2424.49 14.16,2424.49 13.65,2425 -5,2425 -30,2400 -30,1320 -10,1300 P22.2 110,1300 306.42,1496.42 P11.3
SDA: P1.18 P11.4 P20.3 P22.3 R4.1 U3.27 U10.15 | length 5463
  Top Layer w8: U3.27 1926.57,1325
  Top Layer w10: U10.15 642.63,1925 742.05,1825.58 P11.4 728.77,1596.42 715.1,1582.75 712.75,1582.75 575,1445 R4.1 ; P1.18 1677.05,1761.42 1677.05,1697.12 1772.05,1602.12 1772.05,1482.78 1926.57,1328.25
  Bottom Layer w10: P22.3 110,1350 356.42,1596.42 P11.4 750.72,1605.09 750.72,1630.72 842.5,1722.5 ; P20.3 95,2470 842.5,1722.5 ; P1.18 1868.46,2050 1550,2050 1450,2150 1270,2150 842.5,1722.5
SGTL_EN: P1.6 U2.3 U5.3 U6.3 | length 4508.1
  Top Layer w10: U2.3 1525.98,484.02 v1(1560,450) ; v1(1570,985) 1577.65,992.65 1577.65,1016.21 1590.86,1029.41 U6.3 ; v1(2347.05,926.42) 2347.05,847.6 U5.3
  Bottom Layer w10: P1.6 1134,1918.37 1134,1166.86 1195.86,1105 1275,1105 1276,1106 1524,1106 1580,1050 1580,1027.91 1577.09,1025 v1@1577.09,992.09 ; v1@1560,458.28 v1(1560,450) 1568.28,450 2064.14,5 2220,5 2350,135 v1@2350,930 ; v1(1570,985) v1@1577.09,992.09 ; v1(2347.05,926.42) 2293.46,980 1989.23,980 1929.23,1040 1625,1040 v1@1577.09,992.09
SHIELD: P27.1 P28.1 | length 407.1
  Top Layer w10: P28.1 635,840 635,875 655,895 655,919.14 660.86,925 854.14,925 860,919.14 P27.1
TX: P1.1 P10.3 | length 1480.7
  Bottom Layer w10: P10.3 127.68,2755.78 374.49,2755.78 390.31,2739.96 390.31,2712.53 507.83,2595 1310.63,2595 P1.1
UP-RX: P1.4 P14.1 | length 557.6
  Top Layer w10: P14.1 992.05,2296.42 1052.05,2356.42 1262.05,2356.42 P1.4
V_BATT: P2.2 P3.2 P25.2 | length 1100.6
  Top Layer w20: P2.2 1010,3175 1034.38,3150.62 1167.84,3150.62 1248.46,3070 ; P3.2 1435,3065 1440,3070 ; P25.2@1770,2955 P25.2 1770,3070
  Top Layer w30: 1248.46,3070 1440,3070 1770,3070
VA: C8.2 C9.1 C12.1 U2.5 U3.5 | length 503.8
  Top Layer w8: C12.1@1756.3,821.57 U3.5
  Top Layer w10: C8.2 1445,761.5 1445,794.14 1450.86,800 1655.63,800 1676.46,820.83 C12.1 ; U2.5 C8.2@1451.18,747.95
VCC: P1.3.3V P9.1 P11.1 P20.1 P22.1 R4.2 R5.2 U10.2 | length 273.3
  Top Layer w8: R4.2@575,1311.54 590.12,1296.42 640,1296.42 P11.1
  Top Layer w10: v1(70,1925) U10.2
VCC1: C1.2 C29.1 P4.4 U1.5 | length 1020.8
  Top Layer w10: U1.5 U1.5@2453.13,2897.18 ; U1.5@2455.31,2895 U1.5@2453.13,2897.18 ; C1.2@2525.52,2815 2518.86,2821.66 2454.77,2821.66 2453.86,2820.75 2453.13,2821.48 U1.5@2453.13,2897.18 ; C29.1 2763.14,2884.02 2769,2878.16 2769,2425.86 2763.14,2420 2702.4,2420 P4.4
  Top Layer w15: U1.5@2455.31,2895 C29.1@2685,2895
VDDD: C7.1 C26.1 U3.30 U6.5 | length 290.5
  Top Layer w8: C7.1@1827.05,1057.92 1857.08,1057.92 1867.52,1047.48 U3.30
  Top Layer w10: U6.5@1704.45,1083.82 U6.5@1706.85,1081.42 ; U6.5@1712.05,1080 1737.65,1080 1742.18,1075.48 1756.22,1075.48 1763.27,1068.43 1763.27,1067.66 1772.96,1057.97 1772.96,1057.92 C7.1@1827.05,1057.92
VDDIO: C16.1 C19.2 C20.1 U3.20 U5.5 | length 274.4
  Top Layer w8: U3.20@1995.79,821.26 2012.2,821.26 2063.55,769.92 C19.2@2127.05,769.92
  Top Layer w10: C19.2@2132.95,764.02 2187.05,764.02 U5.5@2254.8,764.02
VEXT: P12.2 R3.1 | length 417.5
  Top Layer w10: P12.2 205,770 205,940
VH: C13.2 C14.1 P16.1 P17.1 P26.1 U4.5 | length 1344.4
  Top Layer w10: U4.5 563.82,1053.82 580.59,1070.59 C14.1 659.09,1070.59 C13.2 ; C13.2@660,1075 1235,1075 1275,1035 1275,1000 P26.1 1275,941.42 ; P26.1@1270,995 P26.1@1270,1000 ; P16.1 1275,941.42 ; P17.1 1622.05,941.42 1275,941.42
VIN: C3.2 C4.1 C5.1 C10.1 C15.1 C21.1 C25.1 P1.Vin P2.3 P10.6 R1.2 R3.2 U1.1 U2.1 U4.1 U5.1 U6.1 | length 7816.2
  Top Layer w10: 195,1055 v1@270,1055 ; R3.2 268.46,1053.46 v1@270,1055 ; U4.1@439.8,1057.01 C15.1 375.04,1055 v1@270,1055 ; C5.1 C3.2@737.64,3160.51 ; C3.2 833.46,3161.42 P2.3@912.05,3240 ; C10.1 1444.41,415.86 v1@1450.27,410 ; C10.1@1452.99,482.05 U2.1@1452.99,542.99 ; v1(1455,1070) 1465.82,1070 1481.41,1085.59 1565,1085.59 1570.59,1080 U6.1@1621.55,1080 ; P1.Vin 2103.46,2615 R1.2 ; U5.1 U5.1@2352.24,764.02 ; v1(2402.05,651.42) 2352.24,701.22 U5.1@2352.24,764.02 ; C21.1@2410.24,764.02 U5.1@2352.24,764.02 ; U1.1 U1.1@2453.13,2993.13
  Top Layer w20: 195,1055 -53.28,1055 -65,1066.72 -65,2625 -90,2650 -90,3129.37 P10.6 22.05,3241.42 307.05,3241.42 308.46,3240 884.43,3240 891.96,3247.53 904.52,3247.53 P2.3@912.05,3240 ; C4.1 2451.18,3180 ; U1.1@2453.13,2993.13 C4.1@2453.13,3105
  Top Layer w30: P2.3 915,3255 915,3295 960,3340 1835,3340 2067.5,3107.5 ; P1.Vin 1975,2859.37 1975,3015 2140,3180 2451.18,3180
  other v1: 1443.58,417.05 270,1050
VSENS: P1.A14 R1.1 R2.2 | length 523.6
  Top Layer w10: v1(2040,1710) 2040,1778.46 2046.54,1785 R1.1@2046.54,1845
  Bottom Layer w10: P1.A14 1817.05,1632.05 1840,1655 1985,1655 v1(2040,1710)
pads on no net: J1. P1.3.3V2 P1.15 P1.A10 P1.A11 P1.AGND P1.AREF P1.GND2 P1.PGM P1.VUSB P2.1 P4.0 P4.1 P4.8 P9.2 P13.3 P13.4 P14.3 P14.4 P15.3 P15.4 U3.2 U3.4 U3.6 U3.8 U3.9 U3.16 U3.17 U3.18 U3.19 U3.22 U3.28 U6.4 U10.1 U10.4 U10.5 U10.6 U10.7 U10.8 U10.9 U10.10 U10.11 U10.12
copper on no net: | length 150
  Top Layer w20: 1372.05,1036.42 1372.05,1186.42

## Polygon pours and split planes (outlines as drawn)
DGND on Internal Plane 1 (split plane): 2836.95,1116.52 -122.86,1116.52 -122.86,3386.32 2836.95,3386.32
AGND on Internal Plane 1 (split plane): 2836.95,-123.49 -122.86,-123.49 -122.86,1106.32 2836.95,1106.32
VCC on Internal Plane 2 (split plane): 2836.95,1116.52 -122.86,1116.52 -122.86,3386.32 2836.95,3386.32
VIN on Internal Plane 2 (split plane): 2836.95,-123.49 -122.86,-123.49 -122.86,1106.32 2836.95,1106.32

## Other copper
Internal Plane 1 (plane layer: these items are gaps in the copper):
  lines w10: -142.95,-143.58 2857.05,-143.58 2857.05,1106.42 2852.05,1111.42 -142.95,1111.42 -142.95,-143.58
Internal Plane 2 (plane layer: these items are gaps in the copper):
  lines w10: -142.95,-143.58 2857.05,-143.58 ; -142.95,-143.58 -142.95,-143.58 ; -142.95,-143.58 -142.95,1111.42 2857.05,1111.42 2857.05,-143.58 ; 2857.05,-143.58 2857.05,-143.58

## Silkscreen, mask and mechanical layers (free items; w line width, h text height)
Top Overlay:
  text "ON" at 705,3355 h200 r180
  text "V" at -80,3180 h80 r90
  text "G" at -75,3080 h80 r90
  text "Rx" at -75,2970 h80 r90
  text "Tx" at -80,2860 h80 r90
  text "EN" at 1370,2850 h200 r90
  text "-" at 1520,2815 h160
  text "-" at 1855,2815 h160
  text "+" at 1400,2785 h160
  text "+" at 1735,2785 h160
  text "20" at -80,2765 h80 r90
  text "5" at -75,2685 h80 r90
  text "G" at 130,2545 h60 r270
  text "D" at 130,2495 h60 r270
  text "C" at 130,2440 h60 r270
  text "DN" at 1495,2440 h200 r90
  text "V" at 130,2390 h60 r270
  text "UP" at 1492.05,2090 h200 r90
  text "G" at 105,1425 h60 r270
  text "D" at 105,1375 h60 r270
  text "C" at 105,1320 h60 r270
  text "V" at 105,1270 h60 r270
  text "Loggerhead" at 2665,995 h200 r270
  text "LS1/LS2" at 2490,985 h200 r270
  text "G" at 465,860 h60
  text "Sh" at 550,855 h60
  text "Hydro Bat" at -70,720 h60 r270
  text "GND" at 235,540 h60 r90
  text "+" at 0,445 h160
  text "L" at 2100,275 h60 r90
  text "G" at 1057.05,256.42 h60
  text "S" at 1167.05,256.42 h60
  text "V" at 1277.05,256.42 h60
  text "G" at 1456.89,256.42 h60
  text "S" at 1566.89,256.42 h60
  text "V" at 1672.05,256.42 h60
  text "v3.1" at 2495,255 h100 r270
  text "C" at 710,250 h60
  text "Sh" at 820,250 h60
  text "R" at 2100,170 h60 r90
  text "Gr" at 665,155 h60
  text "2" at 1062.05,146.42 h60
  text "3" at 1167.05,146.42 h60
  text "1" at 1272.05,146.42 h60
  text "Bl" at 830,145 h60
  text "LINE OUT" at 2030,60 h60 r90
  text "G" at 2100,60 h60 r90
  text "LEFT" at 1012.05,-88.58 h60
  text "RIGHT" at 1502.05,-98.58 h60
Bottom Overlay:
  text "+" at 215,3285 h200 r180
  text "-" at 410,3255 h200 r180
  text "+" at 952.05,3106.42 h200 r180
  text "-" at 1137.05,3096.42 h200 r180
  text "G" at 1220,2785 h60 r270
  text "0" at 1220,2690 h60 r270
  text "3V" at 2030,2630 h60 r90
  text "-" at 295,2590 h200 r90
  text "1" at 1220,2590 h60 r270
  text "23" at 2030,2530 h60 r90
  text "2" at 1220,2490 h60 r270
  text "22" at 2030,2420 h60 r90
  text "3" at 1220,2390 h60 r270
  text "21" at 2030,2325 h60 r90
  text "4" at 1220,2290 h60 r270
  text "20" at 2030,2225 h60 r90
  text "5" at 1220,2190 h60 r270
  text "19" at 2030,2135 h60 r90
  text "6" at 1220,2090 h60 r270
  text "18" at 2030,2030 h60 r90
  text "7" at 1220,1990 h60 r270
  text "17" at 2030,1930 h60 r90
  text "8" at 1220,1895 h60 r270
  text "16" at 2030,1825 h60 r90
  text "9" at 1220,1790 h60 r270
  text "15" at 2030,1730 h60 r90
  text "10" at 1220,1675 h60 r270
  text "14" at 2030,1630 h60 r90
  text "11" at 1220,1580 h60 r270
  text "13" at 2030,1530 h60 r90
  text "Vbat" at 1430,1430 h60 r90
  text "12" at 1340,1385 h60
  text "+" at 360,1245 h200 r180
  text "GND" at 195,540 h60 r270
  text "Hydro Bat" at -70,500 h60 r270
  text "+" at 0,445 h160
Mechanical 1:
  the board outline again, w10

## Text inside footprints (layer, text, board x,y; h text height)
C3: Top Overlay "+" at 762.05,3176.42 h19.68
C8: Top Overlay "+" at 1405,765 h19.68 r180
C13: Top Overlay "+" at 645,1095 h19.68 r90
C19: Top Overlay "+" at 2132.06,734.63 h19.68 r270